# EAGLE board Wireless Buzzer (EAGLE 6.5.0)
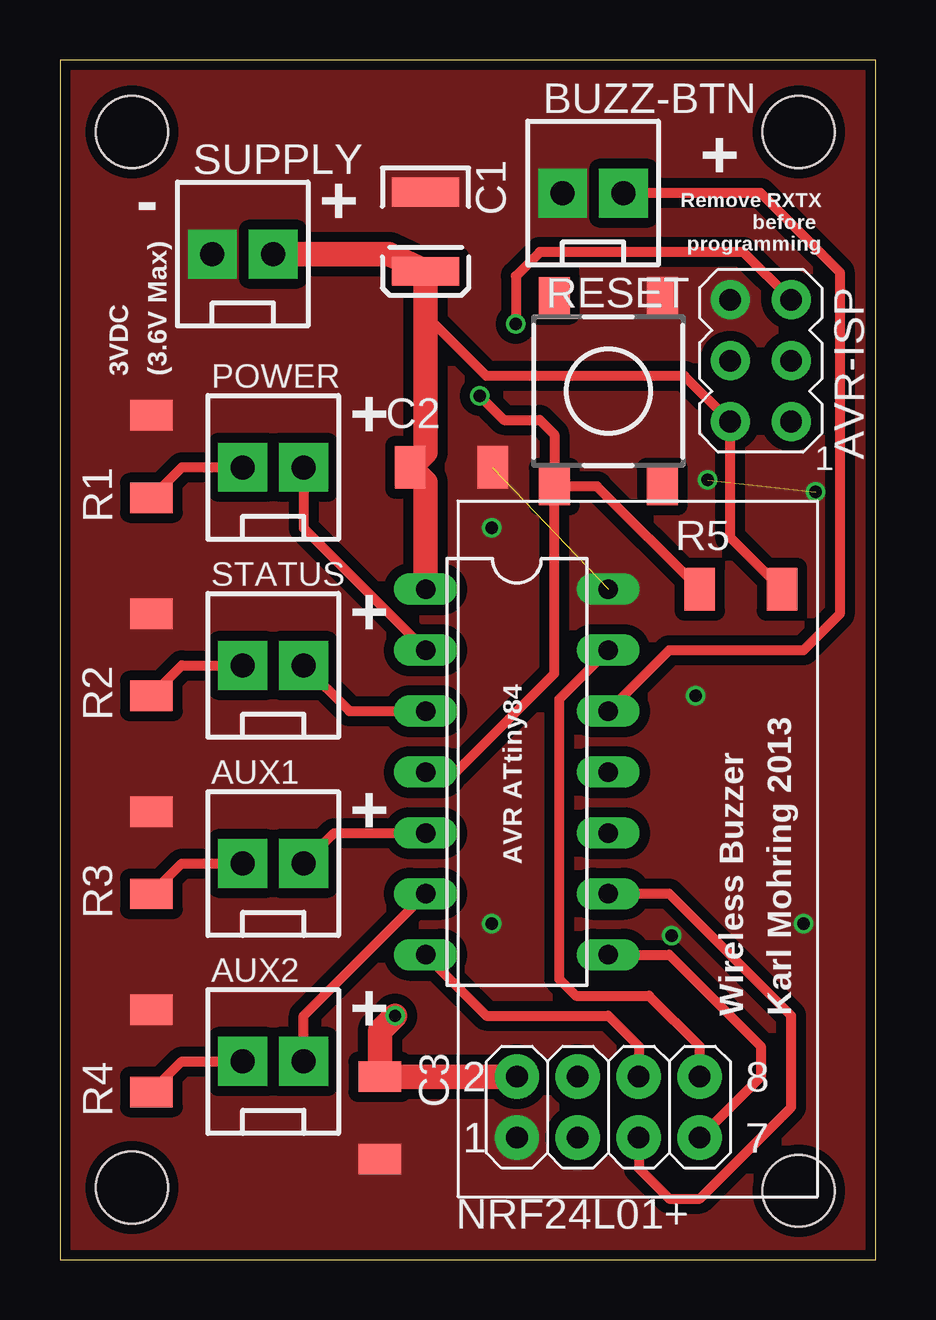
[diagram p0: board, top side]
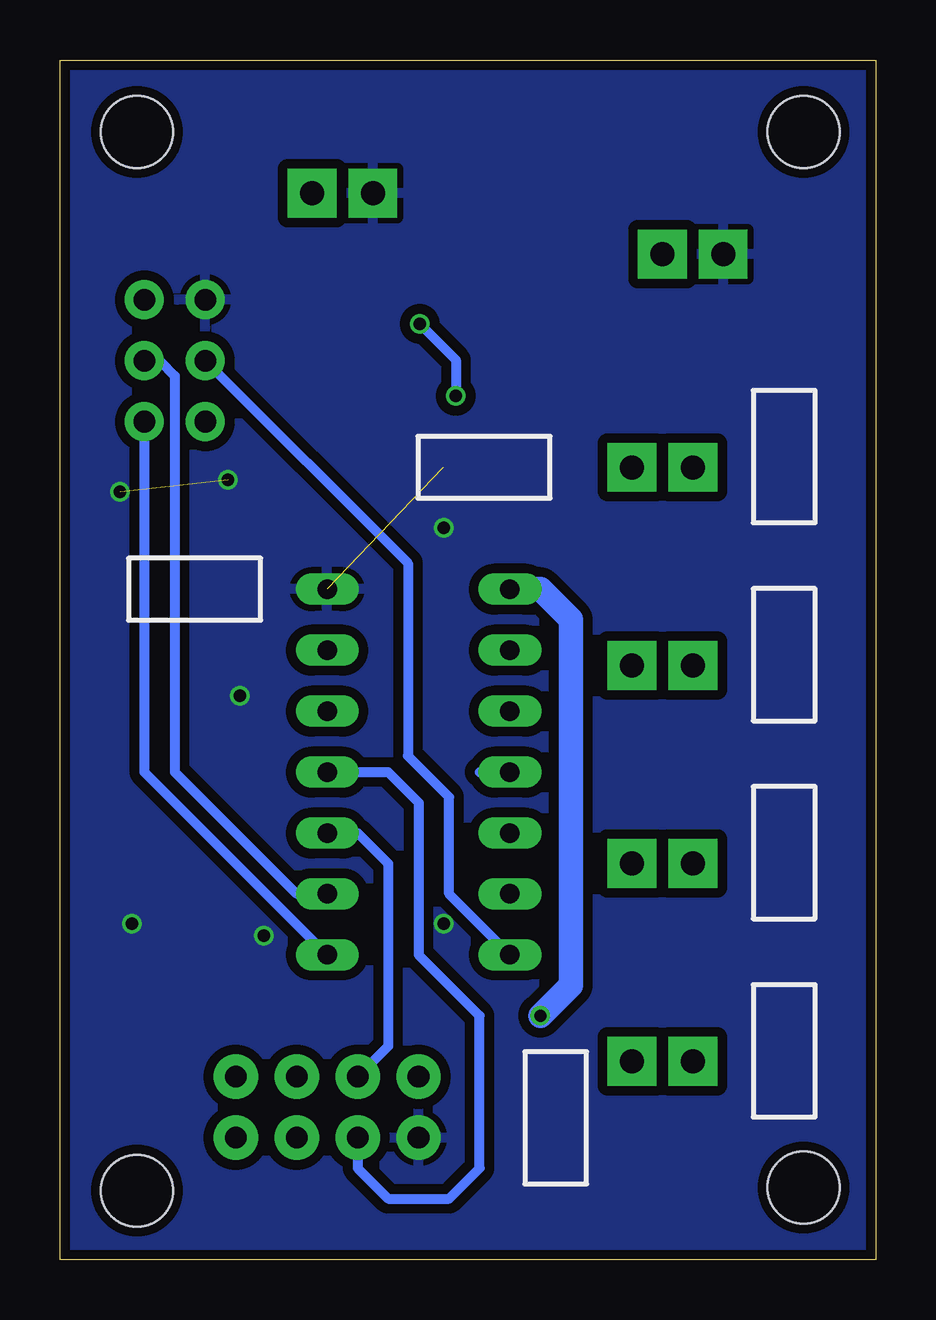
[diagram p1: board, bottom side, seen from below]

Size 34 x 50 mm. Coordinates in mm from the lower left corner, seen from the top.
Outline: 0,0 34,0 34,50 0,50 0,0
Copper layers (1*16): Top 0.035mm / dielectric 1.5mm / Bottom 0.035mm
Design rules "ITEADstudio_DRC": minimum track width 6mil, minimum drill 12mil, track to track 6mil, track to pad 6mil, pad to pad 6mil, via to via 6mil, smd to smd 0mil, copper to edge 10mil, drill to drill 10mil, minimum pad ring 10mil, minimum via ring 6mil, stop-mask expansion 2mil, vias tented up to drill 100mil, thermal gap 10mil
Holes 3 mm at 3,47 30.8,47 3,3 30.8,2.87

## Footprints (pad centres in the part's own frame; a part is rotated, then mirrored left to right if it is on the bottom)
KK-CONNECT-2WAY-PG = drill 1 pad 2.032 square: 1 0,0; 2 2.54,0
AVRISP = drill 0.9 pad 1.626: 1 -1.27,2.54; 2 1.27,2.54; 3 -1.27,0; 4 1.27,0; 5 -1.27,-2.54; 6 1.27,-2.54
SM-TANT-B_EIA3528 = smd 1.2 x 2.8: A 3.3,0; C 0,0
SM-1206_PG = smd 1.27 x 1.778: P$1 0,0; P$2 3.429,0
DIL14 = drill 0.813 long: 1 -7.62,-3.81; 2 -5.08,-3.81; 3 -2.54,-3.81; 4 0,-3.81; 5 2.54,-3.81; 6 5.08,-3.81; 7 7.62,-3.81; 8 7.62,3.81; 9 5.08,3.81; 10 2.54,3.81; 11 0,3.81; 12 -2.54,3.81; 13 -5.08,3.81; 14 -7.62,3.81
DTSM-6 = smd 1.55 x 1.3: 1 -3.975,2.25; 2 3.975,2.25; 3 -3.975,-2.25; 4 3.975,-2.25
NRF24L01+-HEADER = drill 0.9 pad 1.85: 1 -2.54,-2.54; 2 -2.54,0; 3 0,-2.54; 4 0,0; 5 2.54,-2.54; 6 2.54,0; 7 5.08,-2.54; 8 5.08,0

## Placement (x,y rotation side)
AUX1  LED 3  [KK-CONNECT-2WAY-PG]  7.62,16.51 0 top
AUX2  LED 4  [KK-CONNECT-2WAY-PG]  7.62,8.26 0 top
AVR-ISP  [AVRISP]  29.21,37.47 180 top
BUZZ-BTN  Button  [KK-CONNECT-2WAY-PG]  20.95,44.45 0 top
C1  10uF  [SM-TANT-B_EIA3528]  15.24,44.49 270 top
C2  100nF  [SM-1206_PG]  14.61,33.02 0 top
C3  100nF  [SM-1206_PG]  13.34,7.62 270 top
IC1  ATTINY24/44/84-PU  [DIL14]  19.05,20.32 270 top
POWER  LED 1  [KK-CONNECT-2WAY-PG]  7.62,33.02 0 top
R1  270R  [SM-1206_PG]  3.81,31.75 90 top
R2  270R  [SM-1206_PG]  3.81,23.5 90 top
R3  270R  [SM-1206_PG]  3.81,15.24 90 top
R4  270R  [SM-1206_PG]  3.81,6.99 90 top
R5  10K  [SM-1206_PG]  26.67,27.94 0 top
RESET  [DTSM-6]  22.86,36.2 270 top
RXTX  NRF24L01+  [NRF24L01+-HEADER]  21.59,7.62 0 top
STATUS  LED 2  [KK-CONNECT-2WAY-PG]  7.62,24.77 0 top
SUPPLY  +3VDC  [KK-CONNECT-2WAY-PG]  6.35,41.91 0 top

## Library data of the parts
AUX1 AUX2 BUZZ-BTN C1-C3 POWER R1-R5 STATUS SUPPLY = Peter G 060611
AVR-ISP = adafruit
IC1 = attiny24_44_84
RESET = switch-tact
RXTX = Leenix

## Nets
BUTTON: BUZZ-BTN.2 IC1.12
CE: IC1.11 RXTX.3
CS: IC1.10 RXTX.4
GND: AVR-ISP.6 BUZZ-BTN.1 C1.C C2.P$2 C3.P$2 IC1.14 R1.P$2 R2.P$2 R3.P$2 R4.P$2 RESET.1 RXTX.1 SUPPLY.1
IRQ: IC1.13 RXTX.8
LED1: IC1.2 POWER.2
LED2: IC1.3 STATUS.2
LED3: AUX1.2 IC1.5
LED4: AUX2.2 IC1.6
MISO: AVR-ISP.1 IC1.8 RXTX.7
MOSI: AVR-ISP.4 IC1.7 RXTX.6
N$1: POWER.1 R1.P$1
N$3: R2.P$1 STATUS.1
N$5: AUX1.1 R3.P$1
N$7: AUX2.1 R4.P$1
RESET: AVR-ISP.5 IC1.4 R5.P$1 RESET.4
SCL: AVR-ISP.3 IC1.9 RXTX.5
VCC: AVR-ISP.2 C1.A C2.P$1 C3.P$1 IC1.1 R5.P$2 RXTX.2 SUPPLY.2

## Tracks (layer width: path | path; a pad name or v marks a point on that pad's centre or on a via)
BUTTON
  Top 0.406: IC1.12 25.4,25.4 31,25.4 32.5,26.9 32.5,41.16 29.21,44.45 BUZZ-BTN.2
CE
  Bottom 0.406: RXTX.3 21.59,3.81 20.32,2.54 17.78,2.54 16.51,3.81 16.51,10.16 19.05,12.7 19.05,19.05 20.32,20.32 IC1.11
CS
  Bottom 0.406: IC1.10 21.59,17.78 20.32,16.51 20.32,8.89 RXTX.4
GND  (via drill 0.51)  (2 unrouted)
  other vias: 27,32.5 31.5,32 25.5,13.5 18,14 26.5,23.5 31,14 18,30.5
  pour Bottom (isolate 0.406): 0,50 34,50 34,0 0,0
  pour Top (isolate 0.42, no thermals): 0,50 34,50 34,0 0,0
IRQ
  Top 0.406: RXTX.8 26.67,8.89 24.56,11 21.5,11 20.82,11.68 20.82,23.36 IC1.13
LED1
  Top 0.406: POWER.2 10.16,30.48 IC1.2
LED2
  Top 0.406: STATUS.2 12.06,22.86 IC1.3
LED3
  Top 0.406: AUX1.2 11.43,17.78 IC1.5
LED4
  Top 0.406: AUX2.2 10.16,10.16 IC1.6
MISO
  Top 0.406: IC1.8 25.4,12.7 29.21,8.89 29.21,7.62 RXTX.7
  Bottom 0.406: AVR-ISP.1 30.48,20.32 IC1.8
MOSI
  Top 0.406: IC1.7 17.78,10.16 22.86,10.16 24.13,8.89 RXTX.6
  Bottom 0.406: IC1.7 17.78,15.24 17.78,19.28 19.5,21 19.5,29.02 AVR-ISP.4
N$1
  Top 0.406: POWER.1 5.08,33.02 R1.P$1
N$3
  Top 0.406: R2.P$1 5.08,24.77 STATUS.1
N$5
  Top 0.406: R3.P$1 5.08,16.51 AUX1.1
N$7
  Top 0.406: R4.P$1 5.08,8.26 AUX2.1
RESET  (via drill 0.51)
  Top 0.406: IC1.4 16.51,20.32 20.61,24.42 RESET.4 | R5.P$1 22.39,32.22 RESET.4 | AVR-ISP.5 28.48,42 20,42 19,41 v19,39 | 20.61,32.89 RESET.4 | v17.5,36 18.5,35 20,35 20.61,34.39 RESET.4
  Bottom 0.406: 16.51,20.32 IC1.4 | v19,39 17.5,37.5 v17.5,36
SCL
  Top 0.406: RXTX.5 24.13,3.81 25.4,2.54 26.67,2.54 30.48,6.35 30.48,10.16 25.4,15.24 IC1.9
  Bottom 0.406: AVR-ISP.3 29.84,37.47 29.21,36.83 29.21,20.32 24.13,15.24 IC1.9
VCC  (via drill 0.51)
  Top 0.406: R5.P$2 27.94,30.1 AVR-ISP.2 26.04,36.83 17.78,36.83 15.24,39.37 C1.A
  Top 1.016: SUPPLY.2 13.72,41.91 C1.A 15.24,33.66 C2.P$1 15.24,32.38 IC1.1 | v13.97,10.16 13.34,9.53 C3.P$1 RXTX.2
  Bottom 1.016: IC1.1 13.97,27.94 12.7,26.67 12.7,11.43 v13.97,10.16

## Text on the board
tPlace: + | Remove RXTX / before / programming | - | + | 3VDC / (3.6V Max) | + | + | AVR ATtiny84 | + | + | Wireless Buzzer / Karl Mohring 2013